# Altium PCB PCB.PcbDoc
Units mm, origin at the board's own origin, x right, y up, seen from the top; angles counter-clockwise.
Board outline 151.13 x 94.36 mm, 2 copper layers (Top Layer, Bottom Layer); 57 components, 57 nets, 204 pads, 40 vias.
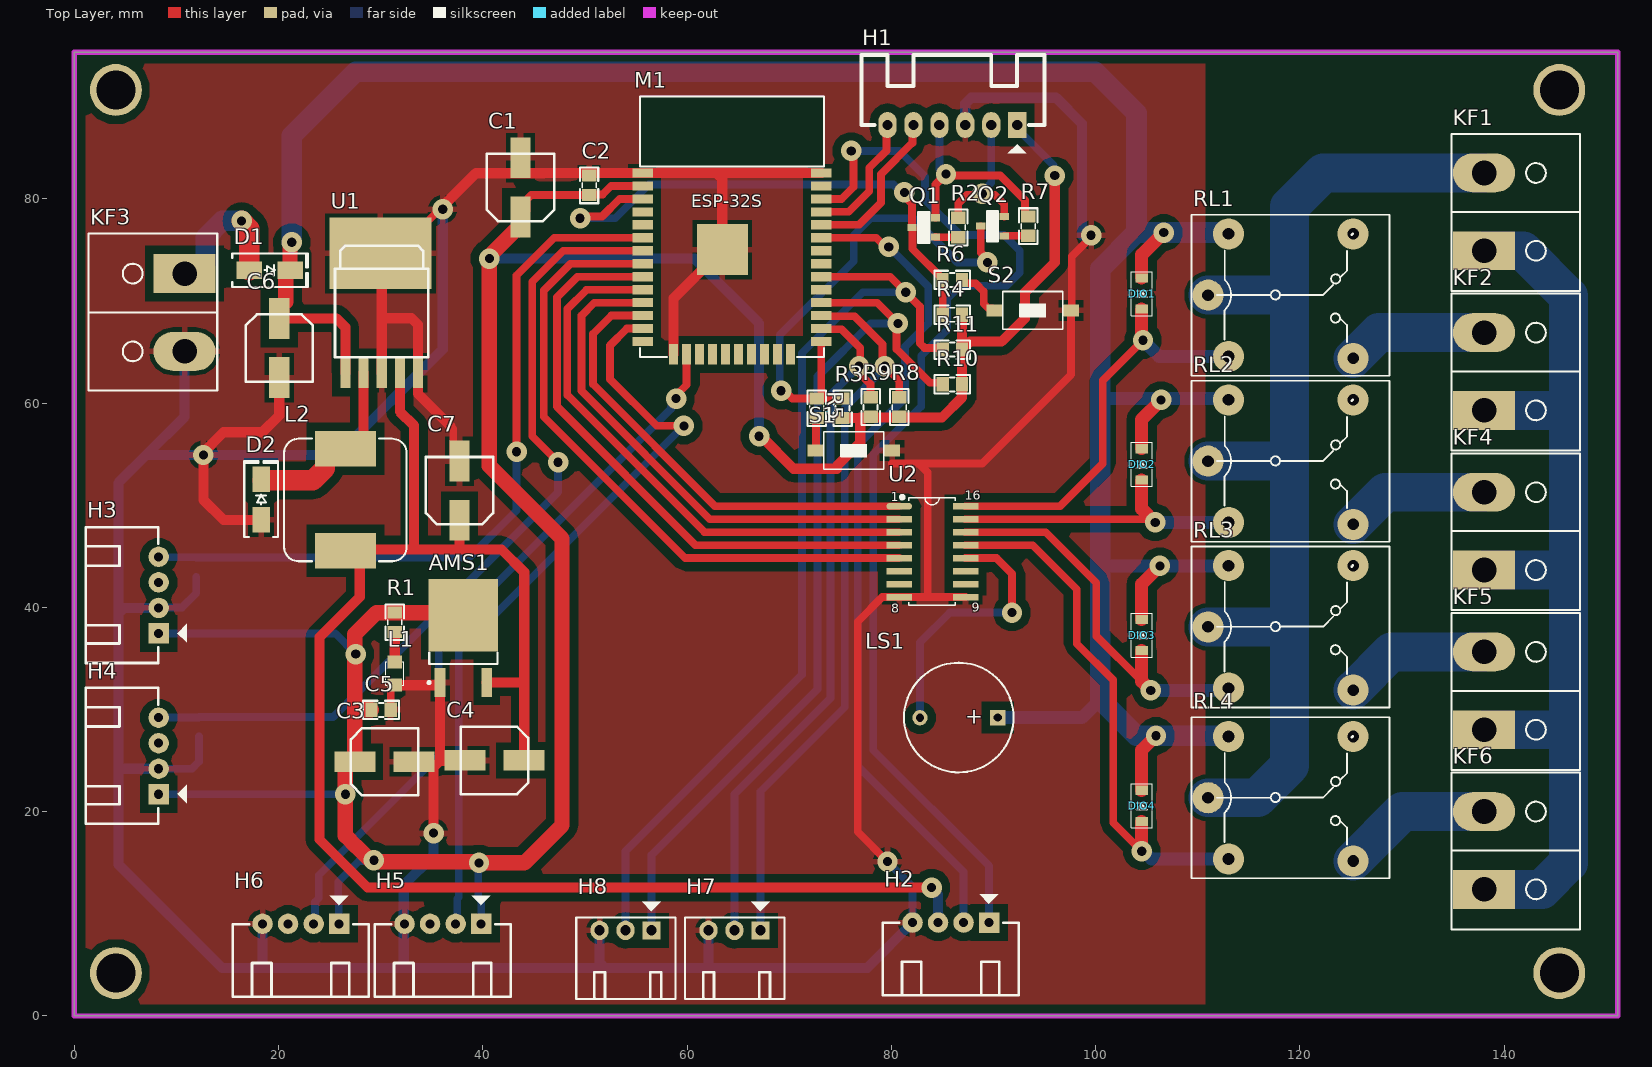
[diagram p0: Top Layer view]
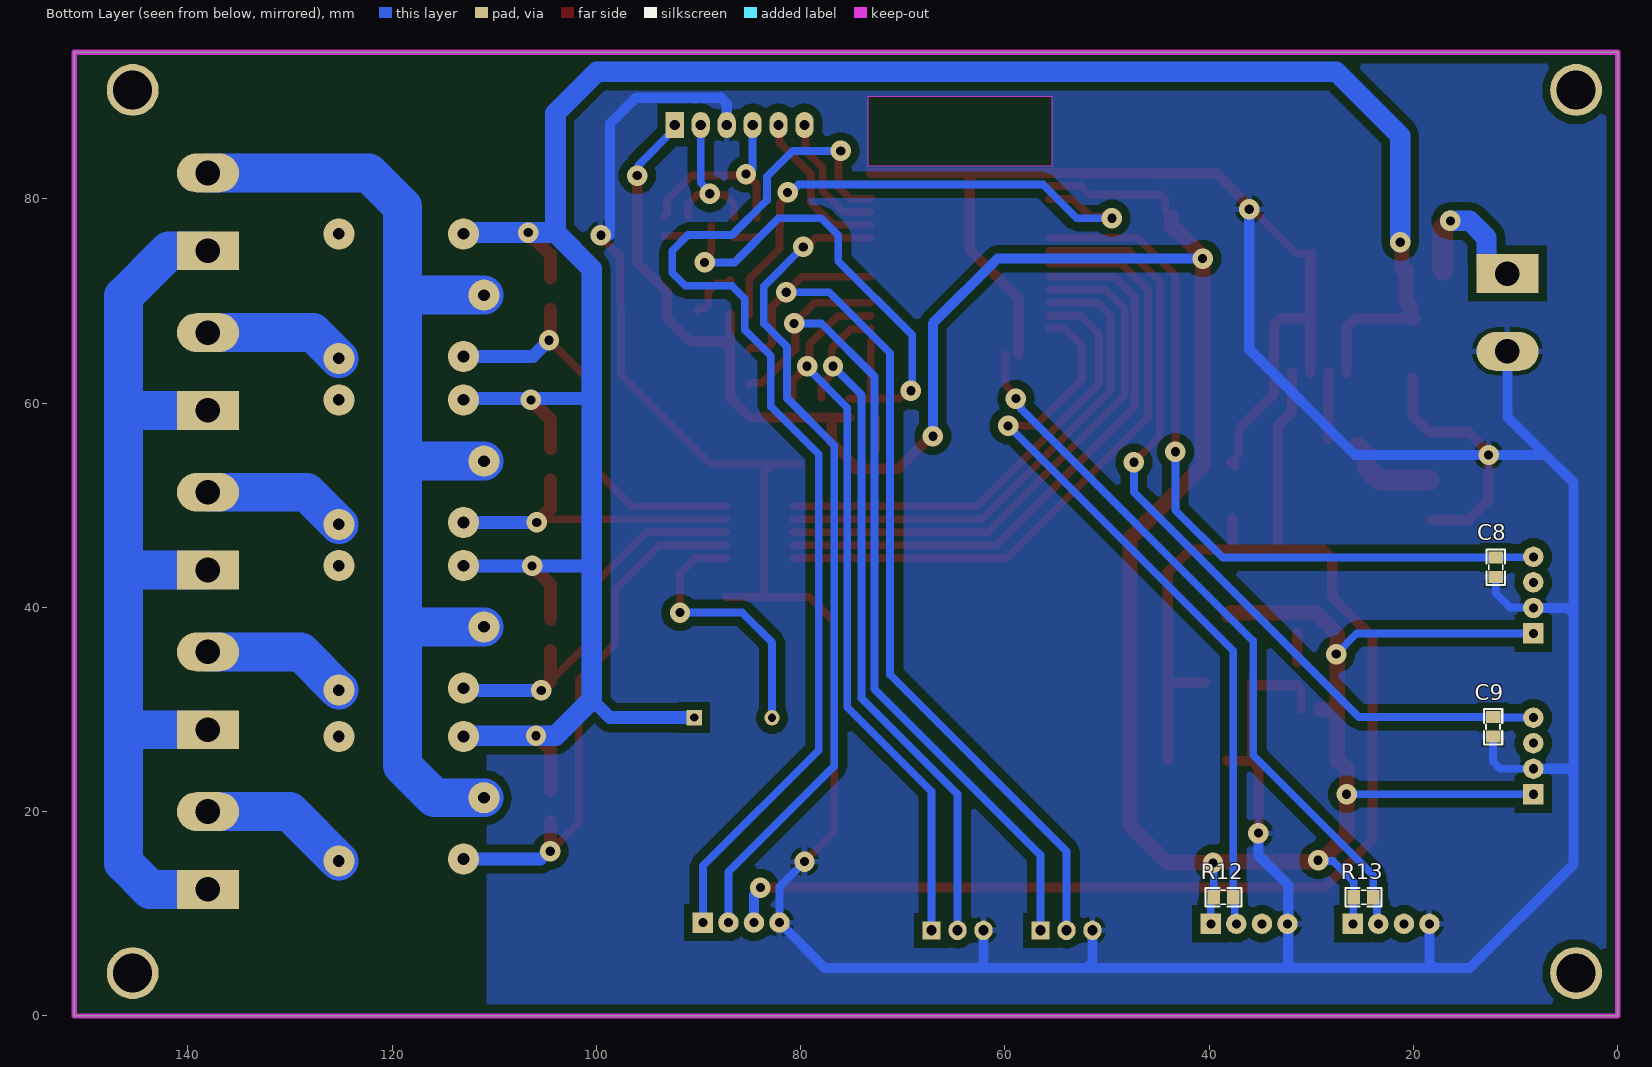
[diagram p1: Bottom Layer view, seen from below]
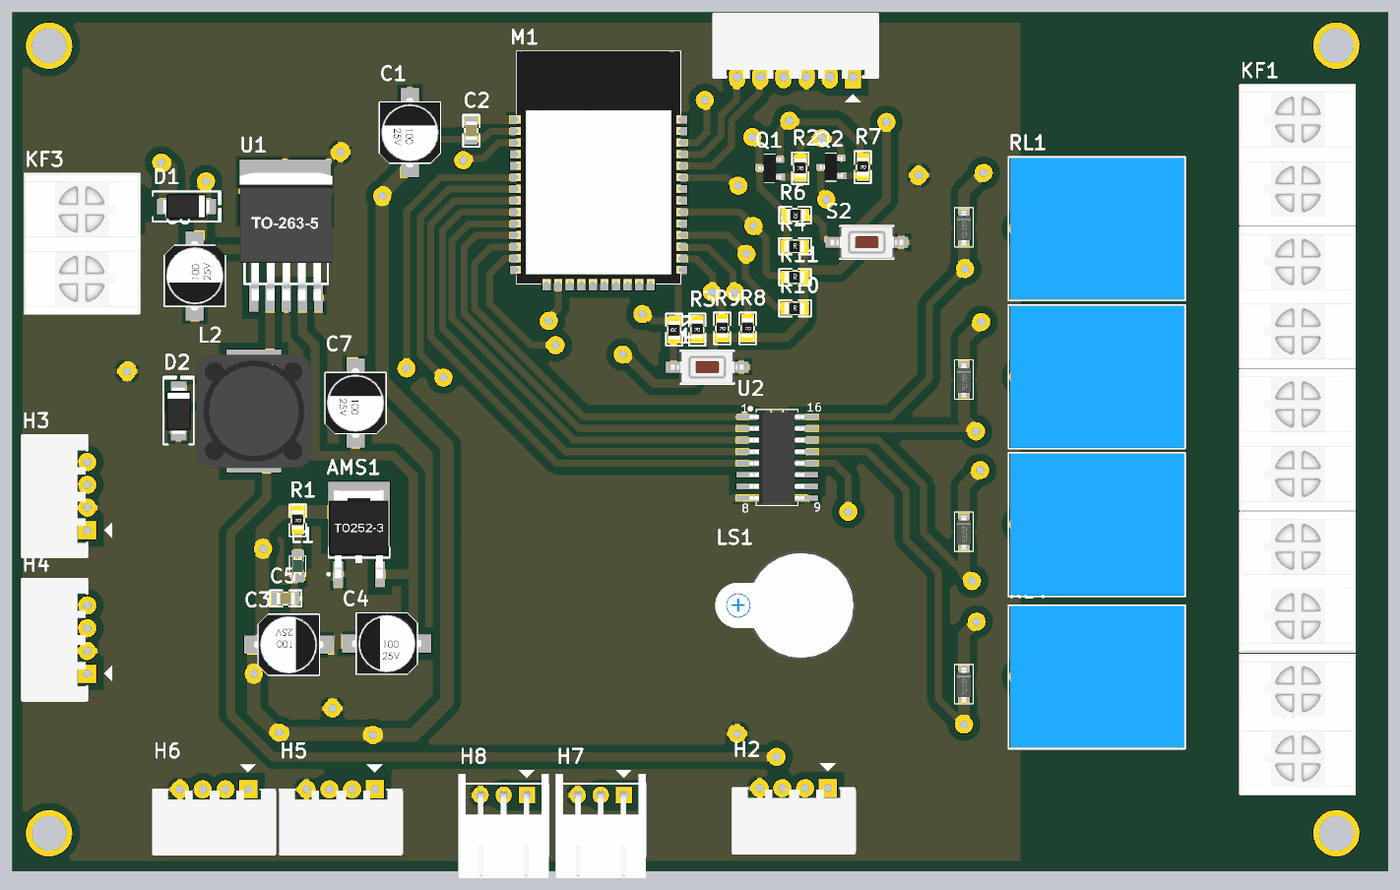
[diagram p2: 3D render of the assembled board from above, using the file's embedded part models]
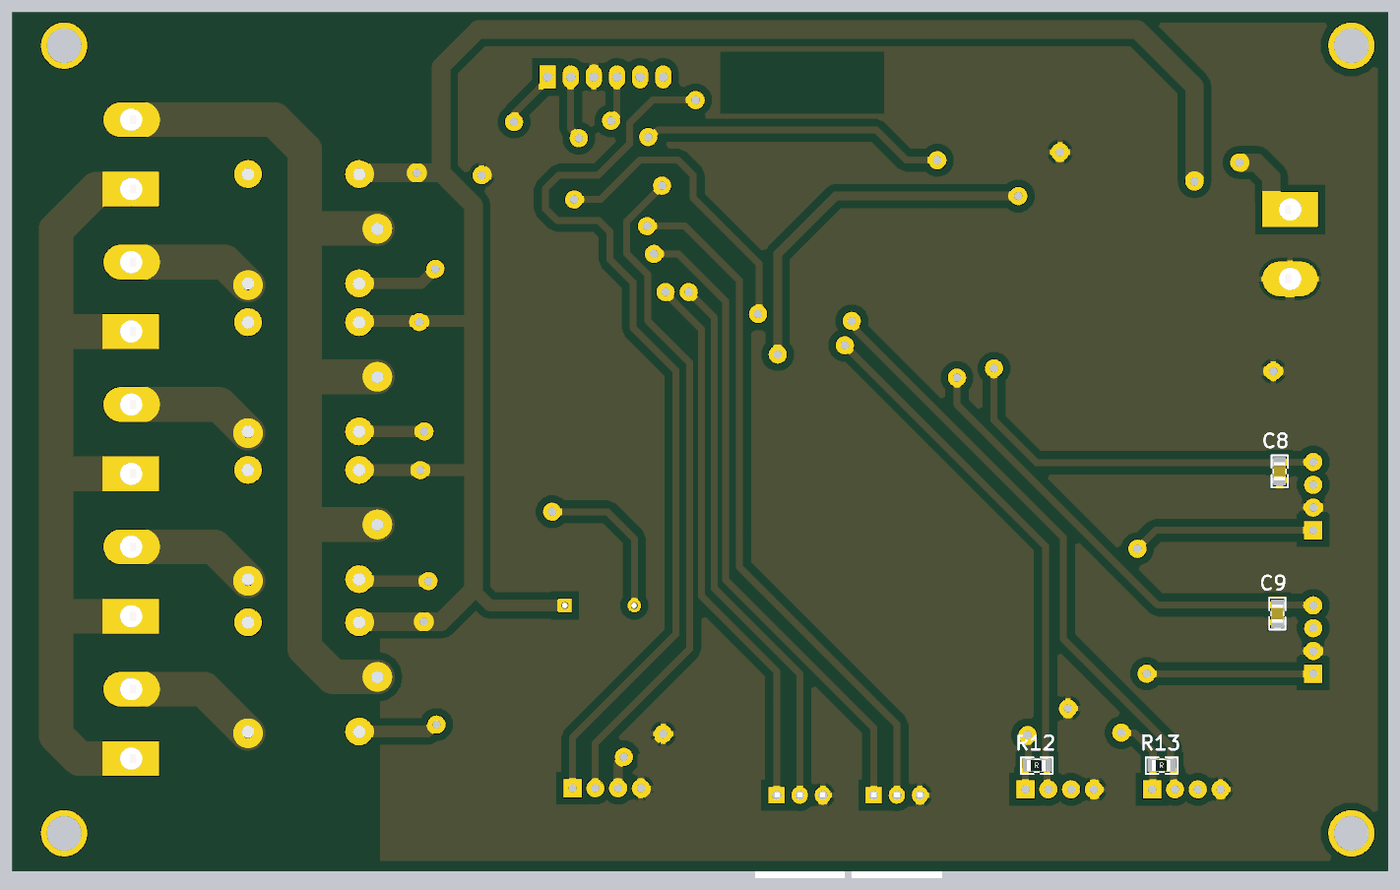
[diagram p3: 3D render of the assembled board from below, using the file's embedded part models]

## Layer stack, top to bottom
Top Solder: solder mask 0.0102, Solder Resist, Dk 3.5
Top Layer: signal copper 0.0356
Dielectric 1: dielectric 0.32, FR-4, Dk 4.8
Bottom Layer: signal copper 0.0356
Bottom Solder: solder mask 0.0102, Solder Resist, Dk 3.5

## Board outline
0,0 0,94.361 151.13,94.361 151.13,0

## Design rules (kind name [scope] priority, off if disabled: settings)
Clearance [All] p1: gap=0.254 ignorepadtopadclearanceinfootprint=FALSE except(0: Arc-Hole Track-Hole SMDPad-Hole THPad-Hole Via-Hole Fill-Hole Poly-Hole Region-Hole Text-Hole; 0.8: Arc-Fill Arc-Poly Arc-Region Track-Fill Track-Poly Track-Region SMDPad-Fill SMDPad-Poly SMDPad-Region THPad-Fill THPad-Poly THPad-Region Via-Fill Via-Poly Via-Region Fill-Fill Fill-Poly Fill-Region Poly-Poly Poly-Region Region-Region)
PlaneConnect [All] p1: planeconnectstyle=Relief reliefexpansion=0.508 reliefentries=4 reliefconductorwidth=0.5 reliefairgap=0.254
PolygonConnect [All] p1: connectstyle=Relief reliefconductorwidth=0.6 reliefentries=4 polygonreliefangle="90 Angle" airgapwidth=0.4
RoutingVias [All] p1: holewidth=2 width=1.5 viastyle="Through Hole" minholewidth=0.711 minwidth=1.27 maxholewidth=0.9 maxwidth=3
SolderMaskExpansion [All] p1: expansion=0.102 istentingtop=FALSE
Width [All] p1: maxlimit=5.08 minlimit=0.254 preferedwidth=0.762
29 further rules are at their usual default settings.

## Components (designator, comment, footprint, x,y, rotation, side; value= is the part's Value field where it differs from the comment)
AMS1 "AMS1117" "TO 252" 41.695,30.955 r90 top
C1 "47uF" "tu nhom 6.3 (d)" 43.688,81.132 r90 top
C2 "104" "tu 0805" 50.416,81.337 r90 top
C3 "47uF" "tu nhom 6.3 (d)" 30.374,24.892 r0 top
C4 "47uF" "tu nhom 6.3 (d)" 41.148,25.019 r180 top
C5 "104" "tu 0805" 30.034,29.975 r0 top
C6 "470uF" "tu nhom 6.3 (d)" 20.066,65.405 r270 top
C7 "470uF" "tu nhom 6.3 (d)" 37.719,51.435 r90 top
C8 "104" "tu 0805" 11.938,43.942 r270 bottom
C9 "104" "tu 0805" 12.192,28.321 r270 bottom
D1 "SS34" "DIODE SMA" 19.145,73.025 r0 top
D2 "SS34" "DIODE SMA" 18.288,50.578 r90 top
DIO1 "Diode SMD" DIO-SMD-123 104.521,70.739 r270 top value=1N5007
DIO2 "Diode SMD" DIO-SMD-123 104.521,54.017 r270 top value=1N5007
DIO3 "Diode SMD" DIO-SMD-123 104.521,37.296 r270 top value=1N5007
DIO4 "Diode SMD" DIO-SMD-123 104.521,20.574 r270 top value=1N5007
H1 "Header 6P 2.54 Duc Cong" "Header 6P DC 2.54" 92.329,87.249 r90 top
H2 "Header 4P 2.54 Duc Cong" "Header 4P DC 2.54" 89.557,9.119 r270 top
H3 "Header 4P 2.54 Duc Cong" "Header 4P DC 2.54" 8.23,37.483 r180 top
H4 "Header 4P 2.54 Duc Cong" "Header 4P DC 2.54" 8.23,21.735 r180 top
H5 "Header 4P 2.54 Duc Cong" "Header 4P DC 2.54" 39.813,8.992 r270 top
H6 "Header 4P 2.54 Duc Cong" "Header 4P DC 2.54" 25.908,8.992 r270 top
H7 "Header 3P 2.54 Duc Cong" "Header 3P DC 2.54" 67.183,8.382 r270 top
H8 "Header 3P 2.54 Duc Cong" "Header 3P DC 2.54" 56.515,8.382 r270 top
KF1 "CON 2 KF7.62" "CON 2 KF7.62" 138.049,74.981 r90 top
KF2 "CON 2 KF7.62" "CON 2 KF7.62" 138.049,59.347 r90 top
KF3 "CON 2 KF7.62" "CON 2 KF7.62" 10.795,72.644 r270 top
KF4 "CON 2 KF7.62" "CON 2 KF7.62" 138.049,43.713 r90 top
KF5 "CON 2 KF7.62" "CON 2 KF7.62" 138.049,28.08 r90 top
KF6 "CON 2 KF7.62" "CON 2 KF7.62" 138.049,12.446 r90 top
L1 "LED 0805" LED-0805-Green 31.369,34.671 r270 top
L2 "Inductor" INDC_L127H_331 26.543,50.546 r270 top value=10mH
LS1 "Coi Chip Speaker" "Coi Chip Speacker" 90.424,29.21 r180 top
M1 "ESP-32S" ESP-32S 64.402,64.54 r0 top
Q1 "C1815_SMD" SOT23 83.185,77.216 r90 top
Q2 "C1815_SMD" SOT23 89.916,77.343 r90 top
R1 "1k" "tro smd 0805" 31.43,38.551 r270 top
R2 "12k" "tro smd 0805" 86.614,77.216 r270 top
R3 "12k" "tro smd 0805" 75.289,59.506 r270 top
R4 "12k" "tro smd 0805" 85.979,68.727 r0 top
R5 "470R" "Tro SMD 0805" 72.644,59.506 r90 top
R6 "470R" "Tro SMD 0805" 85.979,72.009 r180 top
R7 "12k" "tro smd 0805" 93.472,77.343 r270 top
R8 "10k" "tro smd 0805" 80.833,59.633 r270 top
R9 "10k" "tro smd 0805" 78.039,59.628 r270 top
R10 "10k" "tro smd 0805" 85.979,61.91 r0 top
R11 "10k" "tro smd 0805" 85.979,65.319 r0 top
R12 "12k" "tro smd 0805" 38.608,11.684 r180 bottom
R13 "12k" "tro smd 0805" 24.892,11.684 r180 bottom
RL1 "Relay" "Relay 5 Chan SRD" 111.022,70.581 r0 top
RL2 "Relay" "Relay 5 Chan SRD" 111.022,54.325 r0 top
RL3 "Relay" "Relay 5 Chan SRD" 111.022,38.1 r0 top
RL4 "Relay" "Relay 5 Chan SRD" 111.022,21.367 r0 top
S1 "SW-PB" SW-SMD 76.327,55.372 r180 top
S2 "SW-PB" SW-SMD 93.853,69.088 r180 top
U1 "LM2576HVS 5.0V SMD" TO263-5 30.099,68.834 r0 top
U2 "ULN2003D1013TR" SOIC16_50_284_25X90_SMT 84.022,45.491 r0 top

## Footprints (in the part's own frame and the unit in brackets; to place one, negate y for a bottom-side part, rotate by r counter-clockwise, add the part's x,y. Pads: shape width x height; smd on the part's side, far side on the other; paste and mask are expansions set on the pad)
"Coi Chip Speacker" [mm]
  rect 1.5x1.5 hole 0.8: 1(0,0)
  round 1.5 hole 0.8: 2(7.62,0.013)
  silkscreen extent -1.55,-5.38 9.18,5.36, body extent -2.22,-6 13.24,6, height 4.5
"CON 2 KF7.62" [mil]
  rect 150x240 hole 95: 1(-2,0)
  oval 150x240 hole 95: 2(298,0)
  silkscreen extent -157,-370 448,126, body extent -152,-370 448,122, height 493
DIO-SMD-123 [mm]
  rect 0.9x1.2 smd: 1(1.524,0) 2(-1.524,0)
  silkscreen extent -2.16,-1.02 2.16,1.02, body extent -1.76,-0.8 1.94,0.8, height 1.25
"DIODE SMA" [mm] "SMA"
  rect 2.5x1.7 smd: 1(-2,0) 2(2,0)
  silkscreen extent -3.68,-1.65 3.75,1.65, body extent -2.6,-1.37 2.6,1.37, height 2.4
ESP-32S [mm] "ESP-32 WiFi Bluetooth module Dual-core CPU Ethernet port MCU Low-power Bluetooth ESP-32S"
  rect 2x0.9 smd: 1(-8.75,18.01) 2(-8.75,16.74) 3(-8.75,15.47) 4(-8.75,14.2) 5(-8.75,12.93) 6(-8.75,11.66) 7(-8.75,10.39) 8(-8.75,9.12) 9(-8.75,7.85) 10(-8.75,6.58) 11(-8.75,5.31) 12(-8.75,4.04) 13(-8.75,2.77) 14(-8.75,1.5) 25(8.75,1.5) 26(8.75,2.77) 27(8.75,4.04) 28(8.75,5.31) 29(8.75,6.58) 30(8.75,7.85) 31(8.75,9.12) 32(8.75,10.39) 33(8.75,11.66) 34(8.75,12.93) 35(8.75,14.2) 36(8.75,15.47) 37(8.75,16.74) 38(8.75,18.01)
  rect 0.9x2 smd: 15(-5.715,0.25) 16(-4.445,0.25) 17(-3.175,0.25) 18(-1.905,0.25) 19(-0.635,0.25) 20(0.635,0.25) 21(1.905,0.25) 22(3.175,0.25) 23(4.445,0.25) 24(5.715,0.25)
  rect 5x5 smd: 39(-0.95,10.5)
  Keep-Out Layer pour cut-out: -9,18.65 9,18.65 9,25.5 -9,25.5
  silkscreen extent -9,0 9,25.5, body extent -9.04,0 9.04,25.54, height 3
"Header 3P DC 2.54" [mil]
  rect 70x70 hole 39.37 unplated: 1(0,0)
  oval 75x70 hole 39.37 unplated: 2(0,-100) 3(0,-200)
  silkscreen extent -110,-290 265,93, body extent -93,-295 360,95, height 242
"Header 4P DC 2.54" [mil]
  rect 78.74x78.74 hole 35: 1(-1,1)
  round 78.74 hole 35: 2(-1,-97.42) 3(-1,-195.85) 4(-1,-294.28)
  silkscreen extent -110,-409 280,115, body extent 5,-413 278,123, height 290
"Header 6P DC 2.54" [mil]
  rect 100x70 hole 40: 1(0,0)
  oval 100x70 hole 40: 2(0,100) 3(0,200) 4(0,300) 5(0,400) 6(0,500)
  silkscreen extent -110,-105 270,600, body extent -7,-110 278,605, height 227
INDC_L127H_331 [mm] "Chip Inductor, Body 12x12mm, IPC High Density"
  rect 3.5x6 smd: 1(-5,0) 2(5,0)
  silkscreen extent -5.98,-6 6.02,6, body extent -6.25,-6.25 6.25,6.25, height 8
LED-0805-Green [mil]
  rect 50x55 smd: 1(0,0) 2(90,0)
  silkscreen extent 0,-35 90,35, body extent 5,-25 85,25, height 43
"Relay 5 Chan SRD" [mil] "Relay SPDT, 5 pin, 10A,W 650mil, L 800mil, H 800mil"
  round 120 hole 45: 1(0,0) 2(559.06,236.22) 3(559.06,-243.78) 4(78.74,-236.22) 5(78.74,236.22)
  silkscreen extent -63,-311 700,310, body extent -55,-306 697,304, height 602
SOIC16_50_284_25X90_SMT [mm]
  oval 2.5x0.635 smd mask+0.076: 1(-3.25,4.42)
  rect 2.5x0.635 smd mask+0.076: 2(-3.25,3.15) 3(-3.25,1.88) 4(-3.25,0.61) 5(-3.25,-0.66) 6(-3.25,-1.93) 7(-3.25,-3.2) 8(-3.25,-4.47) 9(3.25,-4.47) 10(3.25,-3.2) 11(3.25,-1.93) 12(3.25,-0.66) 13(3.25,0.61) 14(3.25,1.88) 15(3.25,3.15) 16(3.25,4.42)
  silkscreen extent -3.07,-5.3 2.26,5.44, body extent -3.02,-4.97 2.98,4.93, height 1.4
SOT23 [mm] "SOT 23 _ 1-3-2"
  rect 0.7x0.9 smd: 1(-0.95,-1.15) 2(0.95,-1.15) 3(0,1.15)
  silkscreen extent -1.5,-0.55 1.5,0.55, body extent -1.5,-1.28 1.5,1.22, height 1.06
SW-SMD [mm] "Switch SMD type"
  rect 1.6x1.2 smd: 1(-3.75,0) 2(3.75,0)
  silkscreen extent -2.95,-1.85 2.95,1.85, body extent -4,-1.8 4,1.8, height 2.5
TO263-5 [mil] "TO263-5"
  rect 39.37x120 smd: 1(-140,-230) 2(-70,-230) 3(0,-230) 4(70,-230) 5(140,-230)
  rect 393.7x275.59 smd: 6(-5,230)
  silkscreen extent -180,-170 180,260, body extent -200,-242 200,310, height 180
"TO 252" [mm]
  rect 2.85x1.05 smd: 1(1.684,5.881) 3(1.684,1.301)
  rect 7.1x6.8 smd: 2(8.284,3.591)
  silkscreen extent 1.56,0.24 4.61,7.08, body extent 1.25,0.35 10.92,6.89, height 2.29
"tro smd 0805" [mm]
  rect 1.2x1.4 smd: 1(-0.946,-0.061) 2(0.954,-0.061)
  silkscreen extent -1.75,-0.97 1.75,0.84, body extent -1.56,-0.76 1.44,0.64, height 0.53
"Tro SMD 0805" [mm]
  rect 1.2x1.4 smd: 1(-0.946,-0.061) 2(0.954,-0.061)
  silkscreen extent -1.75,-0.97 1.75,0.84, body extent -1.56,-0.76 1.44,0.64, height 0.53
"tu 0805" [mm] "Compoment SMD 80x50mil"
  rect 1.2x1.4 smd: 1(-0.946,-0.003) 2(0.954,-0.003)
  silkscreen extent -1.75,-0.89 1.75,0.89, body extent -1.01,-0.64 1.01,0.63, height 0.61
"tu nhom 6.3 (d)" [mm]
  rect 4x2 smd: 1(-2.9,0) 2(2.9,0)
  silkscreen extent -3.3,-3.3 3.3,3.3, body extent -3.8,-3.3 3.8,3.3, height 8

## Part data
C1 C3 C4 C6 C7: library part "Tu Nhom 47uF 25V", "Dán", Chung_Loai=Dán, Don_Vi=Con, Ma_Hang=MH002216, So_Chan=2, Ten_Linh_Kien="Tụ Nhôm 47uF 25V 6.3x5.5MM"
C2 C5 C8 C9: library part "Tu 0805 104 50V 10%", "Dán", Chung_Loai=Dán, Don_Vi=Con, Ma_Hang=MH004551, So_Chan=2, Ten_Linh_Kien="Tụ 0805 104-100nF 10% 50V"
D1 D2: library part "Diode SS34 ( 1N5822 )", "Dán", Chung_Loai=Dán, Don_Vi=Con, Ma_Hang=MH002104, Ten_Linh_Kien="Diode SS34 3A 40V SMA ( 1N5822 SS34A)"
DIO1 DIO2 DIO3 DIO4: "Default Diode", Code - JEDEC=DO-214-AB, Published=8-Jun-2000, Publisher="Altium Limited", Revision="July-2002: Re-released for DXP Platform."
H1 H2 H3 H4 H5 H6 H7 H8 KF1 KF2 KF3 KF4 KF5 KF6: "Cắm", Chung_Loai=Cắm, Don_Vi=Con
  H1: Ma_Hang=MH003363, Ten_Linh_Kien="Header 6P XH2.54-6P Đực Cong"
  H2 H3 H4 H5 H6: Ma_Hang=MH001310, Ten_Linh_Kien="Header 4P XH2.54-4P Đực Cong"
  H7 H8: Ma_Hang=MH001302, Ten_Linh_Kien="Header 3P XH2.54-3P Đực Cong"
  KF1 KF2 KF3 KF4 KF5 KF6: Ma_Hang=MH002053, Ten_Linh_Kien="CON 2 KF7.62-2P 7.62MM (Đen Thẳng)"
L1: library part "LED 0805 Xanh La", "Dán", Chung_Loai=Dán, Don_Vi=Con, Ma_Hang=MH002326, Ten_Linh_Kien="LED 0805 Màu Xanh Lá (Green)"
LS1: "Còi chip"
M1: library part WIFI_ESP-32S
Q1 Q2: "NPN General Purpose Amplifier", Code_JEDEC=TO-92A, ComponentLink1Description="Manufacturer Link", ComponentLink1URL=http://www.fairchildsemi.com/, ComponentLink2Description=Datasheet, ComponentLink2URL=http://www.fairchildsemi.com/ds/2N%2F2N3904.pdf, DatasheetVersion=1997, LatestRevisionDate=15-Jan-2003, LatestRevisionNote="PCB Footprint 'BCY-W3/D4.7' replaced", PackageReference=TO-92A, PackageVersion=Sep-1998, Published=8-Jun-2000, Publisher="Altium Limited"
R1: library part "Tro 0805 1% 1k", "Dán", Chung_Loai=Dán, Don_Vi=Con, Ma_Hang=MH005468, So_Chan=2, Ten_Linh_Kien="Trở 0805 1% 1k"
R2 R3 R4 R7 R12 R13: library part "Tro 0805 5% 12k", "Dán", Chung_Loai=Dán, Don_Vi=Con, Ma_Hang=MH005241, So_Chan=2, Ten_Linh_Kien="Trở 0805 5% 12k"
R5 R6: library part "Tro 0805 5% 470R", "Dán", Chung_Loai=Dán, Don_Vi=Con, Ma_Hang=MH005341, So_Chan=2, Ten_Linh_Kien="Trở 0805 5% 470R"
R8 R9 R10 R11: library part "Tro 0805 1% 10k", "Dán", Chung_Loai=Dán, Don_Vi=Con, Ma_Hang=MH005473, So_Chan=2, Ten_Linh_Kien="Trở 0805 1% 10k"
RL1 RL2 RL3 RL4: library part "Relay 5 Chan SRD", "Relay 5 Chan", Ma_Hang=MH009374, Ten="Relay 5V10A SRD-05VDC-SL-C Chính Hãng"
S1 S2: "Switch", LatestRevisionDate=17-Jul-2002, LatestRevisionNote="Re-released for DXP Platform.", PackageReference=SPST-2, Published=24-Mar-1999, Publisher="Altium Limited"
U1: "Dán", Chung_Loai=Dán, Don_Vi=Con, Ma_Hang=MH002362, Ten_Linh_Kien="LM2576HVS-5.0V BUCK 5V 3A TO263-5"
U2: library part IC_ULN2003D1013TR, "Bipolar (BJT) Transistor Array 7 NPN Darlington 50V 500mA Surface Mount 16-SO", Alternate Part Number-1=NA, Case/Package=SOIC16, Manufacturer=STMicroelectronics, Supplier Part Number-1=C61273, Manufacturer Part Number=ULN2003D1013TR, Supplier-1=LCSC
L2: Code_IEC=1005, Code_JEITA=0402, LatestRevisionDate=29-May-2009, LatestRevisionNote="IPC-7351 Footprint Added.", PackageDescription="Chip Inductor", PackageReference=0402-A, Published=8-Jun-2000, Publisher="Altium Limited"

## Free pads (board coordinates)
  round 5.08 hole 3.81: 7(145.415,90.678) 8(145.415,4.191) 9(4.064,90.678) 10(4.064,4.191)

## Via types
v1: diameter 2, hole 0.9, Top Layer to Bottom Layer, 40 vias

## Nets (pads, with @x,y where several pads share a name; then routed paths per layer and width w, separated by ;. In a path a pad name is that pad's centre, name@x,y a point inside that pad or via, vN(x,y) a via of type N, cw(c..) or ccw(c..) an arc to the next point about the centre after c; other vN are vias at no path point)
+5: AMS1.3 C4.1 C7.1 H2.3 L2.2 U1.4 | length 155.2
  Top Layer w1: U1.4 31.877,59.182 33.274,57.785 33.274,45.673 ; C7.1@37.719,48.681 37.719,45.673 ; AMS1.3 43.794,32.639 44.048,32.385 ; C4.1 44.048,32.385 ; v1(83.947,12.573) 28.702,12.573 24.003,17.272 24.003,37.084 27.94,41.021 27.94,44.784 28.829,45.673 33.274,45.673 ; 33.274,45.673 37.719,45.673 ; 37.719,45.673 41.83,45.673 44.048,43.455 44.048,32.385
  Bottom Layer w1: v1(83.947,12.573) 83.947,12.5 84.582,11.865 H2.3
+12: C6.1 D1.2 DIO1.2 DIO2.2 DIO3.2 DIO4.2 LS1.1 RL1.5 RL2.5 RL3.5 RL4.5 U1.1 | length 257.7
  Top Layer w1: C6.1 20.701,68.305 25.675,68.305 26.543,67.437 U1.1
  Top Layer w1.27: DIO4.2 104.521,26.035 v1(105.918,27.432) ; DIO3.2 104.521,42.291 v1(106.299,44.069) ; DIO2.2 104.521,58.42 v1(106.426,60.325) ; DIO1.2 104.521,74.549 v1(106.68,76.708)
  Top Layer w1.5: C6.1 20.316,68.555 20.316,69.555 20.701,69.94 20.701,73.025 21.017,73.025 21.117,73.125 21.117,75.465 21.288,75.636 v1(21.288,75.771)
  Bottom Layer w1.27: LS1.1 98.679,29.21 100.457,30.988 ; 100.457,44.069 v1(106.299,44.069) 112.991,44.069 RL3.5 ; 100.457,60.452 106.299,60.452 v1(106.426,60.325) 106.553,60.452 112.895,60.452 RL2.5
  Bottom Layer w2.032: v1(21.288,75.771) 21.288,86.185 27.559,92.456 99.949,92.456 104.013,88.392 104.013,76.708 ; RL4.5 112.957,27.432 v1(105.918,27.432) 104.013,27.432 100.457,30.988 100.457,44.069 100.457,60.452 100.457,73.152 104.013,76.708 ; RL1.5 112.895,76.708 v1(106.68,76.708) 104.013,76.708
BUZZER: LS1.2 U2.12 | length 26.6
  Top Layer w0.762: U2.12 90.297,44.831 91.821,43.307 v1(91.821,39.497)
  Bottom Layer w0.762: LS1.2 82.804,36.576 85.725,39.497 v1(91.821,39.497)
CLK: M1.20
CMD: M1.19
DTR: H1.2 Q2.2 R2.1 | length 15
  Top Layer w0.762: R2.1 86.553,79.564 87.41,80.421 88.803,80.421 v1(88.9,80.518) 88.997,80.421 90.14,80.421 91.066,79.495 Q2.2
  Bottom Layer w0.762: v1(88.9,80.518) 88.9,80.694 89.789,81.583 H1.2
EGND: KF1.1 KF2.1 KF4.1 KF5.1 KF6.1 | length 100.2
  Bottom Layer w3.81: KF6.1 143.713,12.395 146.304,14.986 146.304,28.702 ; KF5.1 145.631,28.029 146.304,28.702 ; KF4.1 146.152,43.663 146.304,43.815 ; KF2.1 145.936,59.296 146.304,58.928 ; KF1.1 141.859,74.93 146.304,70.485 146.304,58.928 ; 146.304,28.702 146.304,43.815 ; 146.304,43.815 146.304,58.928
ESP_EN: M1.3 Q1.3 R4.1 R6.2 | length 53.9
  Top Layer w0.762: v1(49.53,78.105) 49.706,78.281 51.673,78.281 53.402,80.01 M1.3 ; v1(81.28,80.645) 81.28,80.31 82.035,79.555 Q1.3 82.066,77.185 82.066,75.128 85.025,72.17 R6.2 85.022,72.067 85.029,72.06 85.029,68.671 R4.1
  Bottom Layer w0.762: v1(49.53,78.105) 52.959,78.105 56.261,81.407 80.215,81.407 80.977,80.645 v1(81.28,80.645)
GND: AMS1.1 C1.2 C2.2 C3.2 C4.2 C5.2 C6.2 C7.2 C8.2 C9.2 D2.1 H1.3 H2.4 H3.2 H4.2 H5.4 H6.4 H7.3 H8.3 KF3.2 L1.2 M1.1 M1.15 M1.38 M1.39 S1.1 S2.1 U1.3 U1.5 U1.6 U2.8 U2.9 | length 495.3
  Top Layer w0.762: U1.6 31.472,74.676 35.693,78.897 35.971,78.897 v1(36.068,78.994) ; C5.2@31.019,30.003 C5.2 30.988,32.067 31.305,32.385 L1.2 ; 36.803,57.774 37.1,57.478 37.1,54.954 C7.2 ; v1(79.629,15.113) 76.708,18.034 76.708,38.608 79.121,41.021 U2.8 83.566,41.021 ; 80.077,54.102 82.677,54.102 ; U2.9 83.566,41.021 ; v1(99.568,76.454) 99.568,76.278 97.663,74.373 97.663,69.307 97.603,69.247 97.603,62.805 88.9,54.102 82.677,54.102 ; 82.677,54.102 83.566,53.213 83.566,41.021
  Top Layer w1: v1@12.573,55.118 14.605,57.15 18.415,57.15 20.066,58.801 C6.2 ; v1(12.636,54.927) 12.636,50.546 14.605,48.578 D2.1 ; U1.6 30.099,74.549 30.099,68.326 ; U1.3 30.099,68.326 ; L1.2 35.789,32.385 AMS1.1@35.814,32.41 ; v1(35.179,17.907) 35.179,24.373 35.761,24.956 ; v1@35.693,78.897 39.321,82.525 45.941,82.525 45.966,82.55 M1.1 62.865,82.55 ; AMS1.1 AMS1.1@35.814,32.41 ; 36.803,57.774 33.655,60.923 U1.5 33.655,67.691 33.02,68.326 30.099,68.326 ; C7.2@37.465,53.848 C7.2@37.835,54.218 ; C4.2 38.185,24.956 35.761,24.956 ; M1.15 58.687,70.275 M1.39 63.452,81.963 62.865,82.55 ; M1.38 62.865,82.55 ; 35.761,24.956 35.814,25.008 AMS1.1@35.814,32.41
  Bottom Layer w0.762: H4.2 11.517,24.21 12.195,24.889 C9.2 ; H3.2 8.302,40.005 10.541,40.005 11.941,41.405 C8.2 ; v1(79.629,15.113) 82.082,12.66 H2.4
  Bottom Layer w1: H4.2 4.619,24.21 4.318,24.511 ; H3.2 4.904,39.958 4.318,39.372 ; KF3.2 10.795,58.674 7.048,54.927 ; H6.4 18.433,5.225 17.907,4.699 ; v1(35.179,17.907) 35.179,15.748 32.258,12.827 32.258,4.699 ; v1(36.068,78.994) 36.068,65.278 25.717,54.927 v1(12.636,54.927) 7.048,54.927 ; H8.3 51.435,5.207 51.943,4.699 ; H7.3 62.103,4.953 62.357,4.699 ; H2.4 77.637,4.699 62.357,4.699 ; H1.3 87.249,89.33 87.835,89.916 96.139,89.916 98.679,87.376 v1@98.679,76.454 ; 4.318,24.511 4.318,14.859 14.478,4.699 17.907,4.699 ; 4.318,24.511 4.318,39.372 ; 4.318,39.372 4.318,52.197 7.048,54.927 ; 17.907,4.699 32.258,4.699 ; 32.258,4.699 51.943,4.699 ; 51.943,4.699 62.357,4.699
IO0: M1.25 Q2.3 R3.1 R5.2 | length 49.7
  Top Layer w0.762: v1(69.215,61.214) 69.55,61.214 70.303,60.461 R5.2 72.709,60.456 73.406,60.456 ; M1.25 73.152,60.71 73.406,60.456 ; R3.1 75.224,60.456 73.406,60.456 ; Q2.3@88.766,77.312 88.766,74.764 89.408,74.122 v1(89.408,73.787)
  Bottom Layer w0.762: v1(69.215,61.214) 69.088,61.341 69.088,66.675 76.327,73.914 76.327,76.454 77.978,78.105 82.169,78.105 86.487,73.787 v1(89.408,73.787)
IO2: M1.24
IO4: H7.2 M1.26 R9.1 | length 70.1
  Top Layer w0.762: M1.26 73.221,67.241 75.126,67.241 76.962,65.405 76.962,63.627 77.072,63.517 77.072,62.755 77.956,61.871 77.956,60.596 R9.1
  Bottom Layer w0.762: H7.2 64.643,21.717 74.041,31.115 74.041,60.833 v1(76.835,63.627)
IO5: M1.29
IO12: M1.14
IO13: H6.2 M1.16 R13.2 | length 70.9
  Top Layer w0.762: v1(58.928,60.452) 58.928,60.787 59.957,61.816 M1.16
  Bottom Layer w0.762: H6.2 23.574,9.158 23.574,11.16 23.938,11.523 R13.2 23.938,13.778 35.687,25.527 35.687,36.703 58.429,59.445 58.429,59.618 58.928,60.117 v1(58.928,60.452)
IO14: H5.2 M1.13 R12.2 | length 74.3
  Top Layer w0.762: M1.13 54.102,67.31 52.451,65.659 52.451,62.357 57.023,57.785 v1(59.69,57.785)
  Bottom Layer w0.762: H5.2 37.496,9.175 37.496,11.465 R12.2 37.654,35.749 v1(59.69,57.785)
IO15: M1.23
IO16: H7.1 M1.27 R8.1 | length 73.3
  Top Layer w0.762: M1.27 73.221,68.511 76.396,68.511 79.138,65.769 79.138,63.864 80.772,62.23 R8.1
  Bottom Layer w0.762: H7.1 67.183,21.971 75.438,30.226 75.438,59.563 79.375,63.5 v1(79.375,63.627)
IO17: H8.1 M1.28 R10.1 | length 87.9
  Top Layer w0.762: M1.28 78.613,69.85 v1(80.645,67.818) 80.518,67.691 80.518,65.278 83.794,62.002 84.88,62.002 R10.1
  Bottom Layer w0.762: H8.1 56.515,15.748 72.771,32.004 72.771,62.611 77.978,67.818 v1(80.645,67.818)
IO18: H8.2 M1.30 R11.1 | length 93.6
  Top Layer w0.762: M1.30 79.883,72.39 v1@81.644,70.629 ; v1(81.407,70.866) 82.804,69.469 82.804,65.867 83.25,65.421 84.87,65.421 R11.1
  Bottom Layer w0.762: H8.2 53.975,16.129 71.247,33.401 71.247,64.897 77.216,70.866 v1(81.407,70.866)
IO19: M1.31
IO23: M1.37
IO25: M1.10 U2.3 | length 54.6
  Top Layer w0.762: M1.10 50.165,71.12 48.275,69.23 48.275,60.818 61.722,47.371 U2.3
IO26: M1.11 U2.2 | length 50.2
  Top Layer w0.762: M1.11 50.927,69.85 49.657,68.58 49.657,61.214 62.23,48.641 U2.2
IO27: M1.12 U2.1 | length 45.5
  Top Layer w0.762: M1.12 52.578,68.58 50.8,66.802 50.8,61.849 62.738,49.911 U2.1
IO32: M1.8 U2.5 | length 63.7
  Top Layer w0.762: M1.8 48.594,73.66 45.974,71.04 45.974,58.674 59.817,44.831 U2.5
IO33: M1.9 U2.4 | length 59.1
  Top Layer w0.762: M1.9 49.276,72.39 47.259,70.373 47.259,59.675 60.833,46.101 U2.4
IO34: C8.1 H3.4 M1.6 | length 73.9
  Top Layer w0.762: v1(43.307,55.245) 43.307,72.517 46.99,76.2 M1.6
  Bottom Layer w0.762: H3.4 8.29,44.923 11.906,44.923 C8.1 38.665,44.888 43.307,49.53 v1(43.307,55.245)
IO35: C9.1 H4.4 M1.7 | length 82
  Top Layer w0.762: v1(47.371,54.229) 44.831,56.769 44.831,71.882 47.879,74.93 M1.7
  Bottom Layer w0.762: H4.4 8.283,29.238 12.167,29.238 C9.1 25.33,29.267 47.371,51.308 v1(47.371,54.229)
NetD2_2: D2.2 L2.1 U1.2 | length 15.6
  Top Layer w1: L2.1@28.321,56.435 U1.2
  Top Layer w2: D2.2@18.438,52.451 23.371,52.451 24.543,53.623 24.543,54.796 L2.1@25.42,55.673
NetKF2_2: KF2.2 RL1.3 | length 13.9
  Bottom Layer w3.81: RL1.3 127.749,66.916 KF2.2
NetKF4_2: KF4.2 RL2.3 | length 14.1
  Bottom Layer w3.81: RL2.3 128.372,51.283 KF4.2
NetKF5_2: KF5.2 RL3.3 | length 14.4
  Bottom Layer w3.81: RL3.3 128.963,35.649 KF5.2
NetKF6_2: KF6.2 RL4.3 | length 14.8
  Bottom Layer w3.81: RL4.3 130.062,20.015 KF6.2
NetL1_1: L1.1 R1.2 | length 2.9
  Top Layer w1: L1.1 R1.2
NetQ1_1: Q1.1 R2.2 | length 2.2
  Top Layer w0.762: Q1.1 84.337,76.264 86.551,76.264 R2.2
NetQ2_1: Q2.1 R7.2 | length 2.3
  Top Layer w0.762: Q2.1 91.068,76.391 93.409,76.391 R7.2
NetR5_1: R5.1 S1.2 | length 3.2
  Top Layer w0.762: S1.2@72.641,55.372 72.641,58.497 R5.1
NetR6_1: R6.1 S2.2 | length 5.2
  Top Layer w0.762: R6.1 86.925,71.97 87.144,71.751 88.243,71.751 89.062,70.932 89.062,69.753 89.508,69.307 89.884,69.307 S2.2
R1: DIO1.1 RL1.4 U2.16 | length 41
  Top Layer w0.762: U2.16 96.52,49.911 100.711,54.102 100.711,62.23 v1(104.648,66.167)
  Top Layer w1.27: DIO1.1 104.521,66.294 v1(104.648,66.167)
  Bottom Layer w1.27: v1(104.648,66.167) 106.234,64.581 RL1.4
R2: DIO2.1 RL2.4 U2.15 | length 30.6
  Top Layer w0.762: U2.15 105.4,48.641 105.716,48.325 v1(105.853,48.325)
  Top Layer w1.27: DIO2.1 104.521,49.657 v1(105.853,48.325)
  Bottom Layer w1.27: v1(105.853,48.325) RL2.4
R3: DIO3.1 RL3.4 U2.14 | length 38.3
  Top Layer w0.762: U2.14 95.123,47.371 100.076,42.418 100.076,37.211 104.521,32.766
  Top Layer w1.27: DIO3.1 104.521,32.766 v1(105.41,31.877)
  Bottom Layer w1.27: v1(105.41,31.877) 112.799,31.877 RL3.4
R4: DIO4.1 RL4.4 U2.13 | length 52.7
  Top Layer w0.762: U2.13 93.853,46.101 98.171,41.783 98.171,36.449 101.727,32.893 101.727,18.923 v1(104.521,16.129)
  Top Layer w1.27: v1(104.521,16.129) DIO4.1
  Bottom Layer w1.27: v1(104.521,16.129) 104.719,16.129 105.481,15.367 RL4.4
RTS: H1.4 Q1.2 R7.1 | length 20.4
  Top Layer w0.762: Q1.2 84.335,81.414 v1(85.357,82.436) 85.497,82.296 90.678,82.296 93.092,79.882 93.092,78.508 93.311,78.289 R7.1
  Bottom Layer w0.762: H1.4 84.709,82.941 85.214,82.436 v1(85.357,82.436)
SCL: H2.1 M1.36 | length 108.3
  Top Layer w0.762: M1.36 75.138,80.01 76.31,81.182 76.31,84.472 v1(76.073,84.709)
  Bottom Layer w0.762: v1(76.073,84.709) 80.772,84.709 83.312,82.169 83.312,79.883 86.728,76.467 91.046,76.467 92.583,74.93 92.583,72.771 91.313,71.501 86.741,71.501 85.471,70.231 85.471,67.183 82.931,64.643 82.931,59.69 78.232,54.991 78.232,26.035 89.582,14.685 H2.1
SD0: M1.21
SD1: M1.22
SD2: M1.17
SD3: M1.18
SDA: H2.2 M1.33 | length 81.9
  Top Layer w0.762: M1.33 78.532,76.2 79.421,75.311 v1(79.756,75.311)
  Bottom Layer w0.762: v1(79.756,75.311) 83.629,71.438 83.629,67.818 81.343,65.532 81.343,60.515 76.708,55.88 76.708,24.471 87.082,14.097 H2.2
SVN: M1.5
SVP: M1.4
U0RX: H1.5 M1.34 | length 15.7
  Top Layer w0.762: M1.34 76.835,77.47 78.994,79.629 78.994,82.423 82.066,85.495 82.066,87.146 H1.5
U0TX: H1.6 M1.35 | length 12.8
  Top Layer w0.762: M1.35 75.819,78.74 77.851,80.772 77.851,83.058 79.526,84.733 79.526,87.146 H1.6
"V in": D1.1 KF3.1 | length 14.4
  Top Layer w2: v1(16.383,77.851) 17.145,77.089 D1.1
  Bottom Layer w2: KF3.1 10.906,72.695 11.811,73.6 12.843,73.6 12.843,76.216 14.478,77.851 v1(16.383,77.851)
V+: KF1.2 RL1.1 RL2.1 RL3.1 RL4.1 | length 108.9
  Bottom Layer w3.81: RL4.1 115.855,21.367 118.999,24.511 118.999,36.957 ; RL3.1 117.856,38.1 118.999,36.957 ; RL2.1 118.776,54.325 118.999,54.102 ; RL1.1 111.053,70.612 118.999,70.612 ; KF1.2 122.301,82.55 118.999,79.248 118.999,70.612 ; 118.999,36.957 118.999,54.102 ; 118.999,54.102 118.999,70.612
VCC: AMS1.2 C1.1 C2.1 C3.1 C5.1 H1.1 H3.1 H4.1 H5.1 H6.1 M1.2 R1.1 R3.2 R4.2 R8.2 R9.2 R10.2 R11.2 R12.1 R13.1 | length 292.4
  Top Layer w0.762: C1.1 44.307,78.851 44.307,79.945 44.753,80.391 C2.1 50.48,80.452 51.75,80.452 52.578,81.28 M1.2
  Top Layer w1: v1(67.056,56.769) 67.249,56.769 70.424,53.594 74.676,53.594 74.676,53.848 76.962,56.134 76.962,58.552 R3.2 ; 76.962,58.609 84.963,58.609 86.933,60.579 R10.2 R11.2 R11.2@86.933,65.358 ; R4.2 R11.2@86.933,65.358 ; v1(96.012,82.296) 96.012,73.787 93.091,70.866 93.091,68.326 90.805,66.04 87.716,66.04 87.133,65.458 87.033,65.458 R11.2@86.933,65.358
  Top Layer w1.5: C5.1 27.601,29.972 27.474,29.845 ; AMS1.2 37.846,39.497 R1.1 29.591,39.497 27.474,37.38 27.474,29.845 ; C1.1 43.688,77.232 43.438,76.982 43.2,76.982 40.736,74.518 40.736,74.264 v1(40.64,74.168) 40.64,53.848 47.752,46.736 47.752,18.669 44.069,14.986 v1(39.624,14.986) 39.497,15.113 29.464,15.113 v1(29.337,15.24) 29.002,15.24 27.677,16.565 27.631,16.565 26.543,17.653 v1(26.543,21.717) 26.543,24.273 27.162,24.892 C3.1 27.474,29.845
  Bottom Layer w0.762: H4.1 8.259,21.713 26.539,21.713 v1(26.543,21.717) ; H3.1 25.534,37.458 v1(27.559,35.433) ; H6.1 25.885,9.065 25.885,11.575 R13.1 25.838,13.138 27.885,15.185 29.282,15.185 v1(29.337,15.24) ; R12.1 39.554,14.916 v1(39.624,14.986) ; H5.1 R12.1@39.838,11.239 ; H1.1 92.329,86.868 95.915,83.282 95.915,82.393 v1(96.012,82.296)
  Bottom Layer w1: v1(40.64,74.168) 60.706,74.168 67.056,67.818 v1(67.056,56.769)
pads on no net: H3.3 H4.3 H5.3 H6.3 M1.32 RL1.2 RL2.2 RL3.2 RL4.2 U2.6 U2.7 U2.10 U2.11

## Polygon pours and split planes (outlines as drawn)
GND on Bottom Layer "GND_L02_P000" (solid, remove dead copper, pour order 0): 110.744,0 110.744,94.361 0,94.361 0,0
GND on Top Layer "GND_L01_P001" (solid, remove dead copper, pour order 1): 110.744,0.762 110.744,94.361 0,94.361 0,0

## Keep-outs
Keep-Out Layer:
  the board outline again, w0.508

## Text inside footprints (layer, text, board x,y; h text height)
LS1: Top Overlay "+" at 89.014,29.921 h1.52 r180
U2: Top Overlay "16" at 87.172,50.546 h0.89; Top Overlay "9" at 87.9,39.582 h0.89; Top Overlay "8" at 80.006,39.459 h0.89; Top Overlay "1" at 79.933,50.419 h0.89